# EAGLE board Mother-Child-merged (EAGLE 7.4.0), part 1 of 2
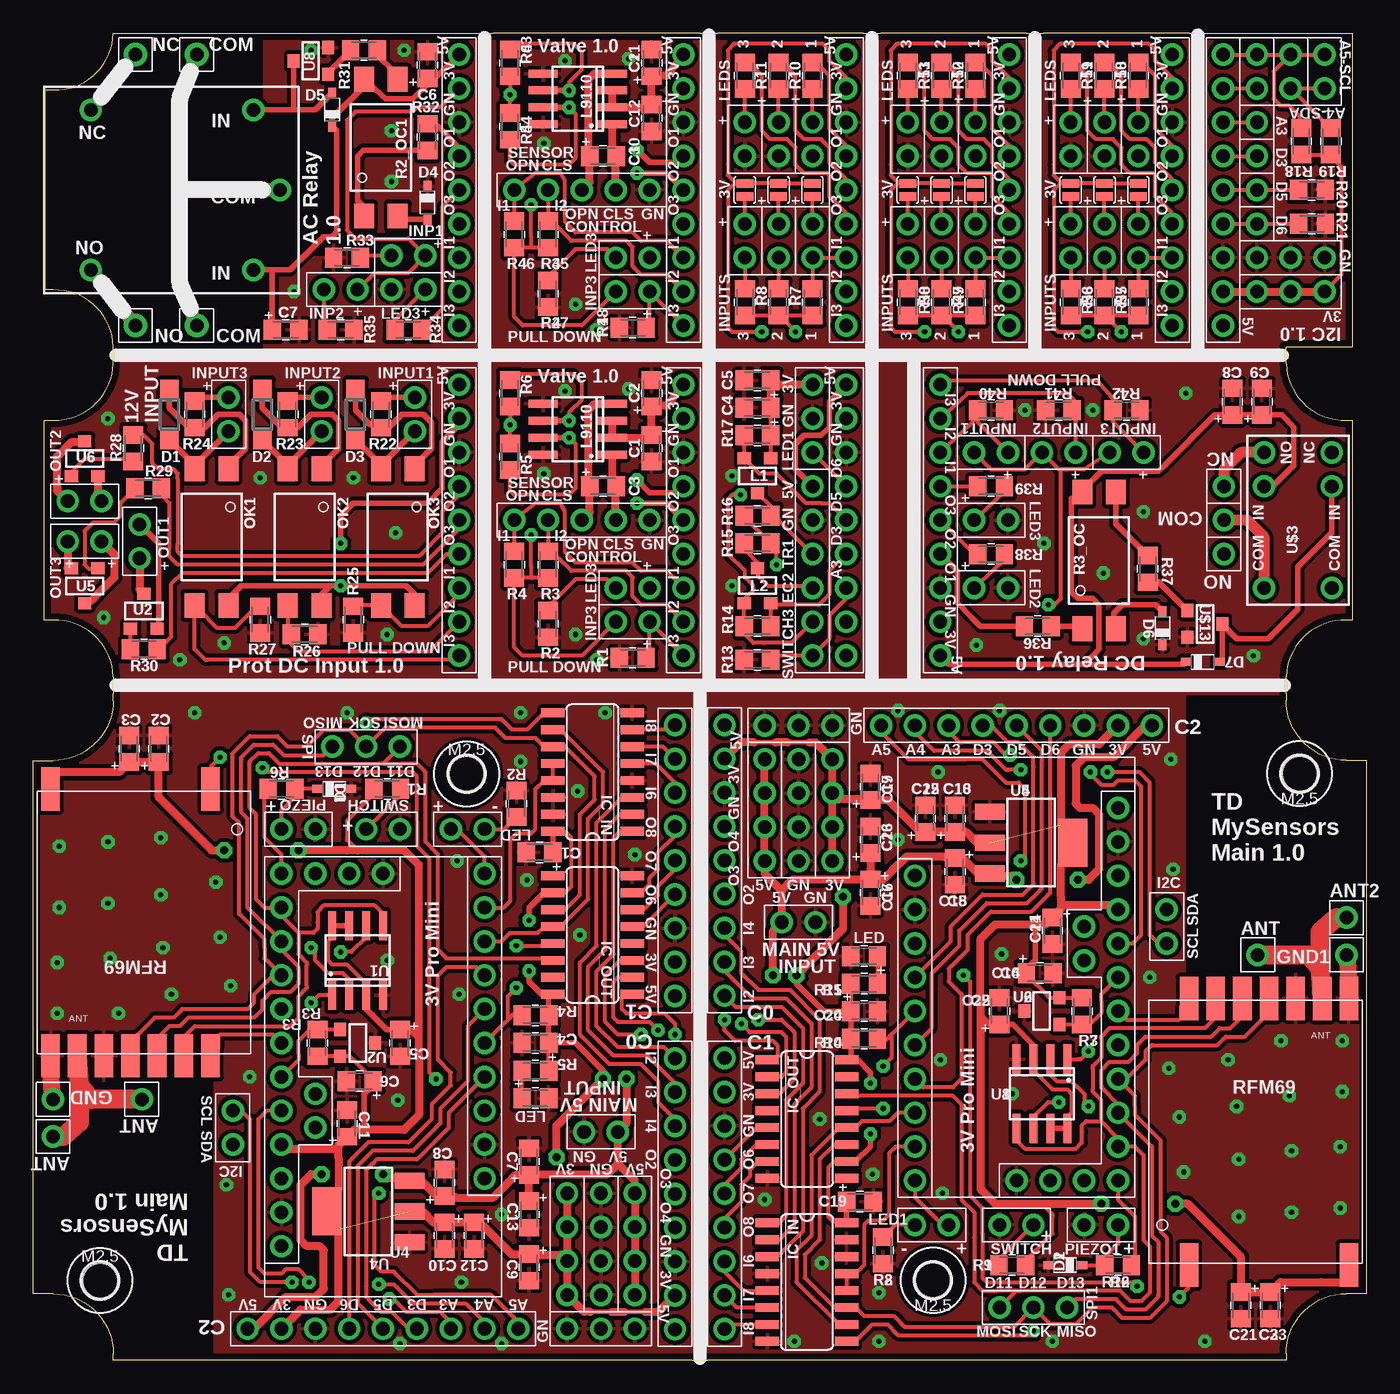
[diagram p0: board, top side]
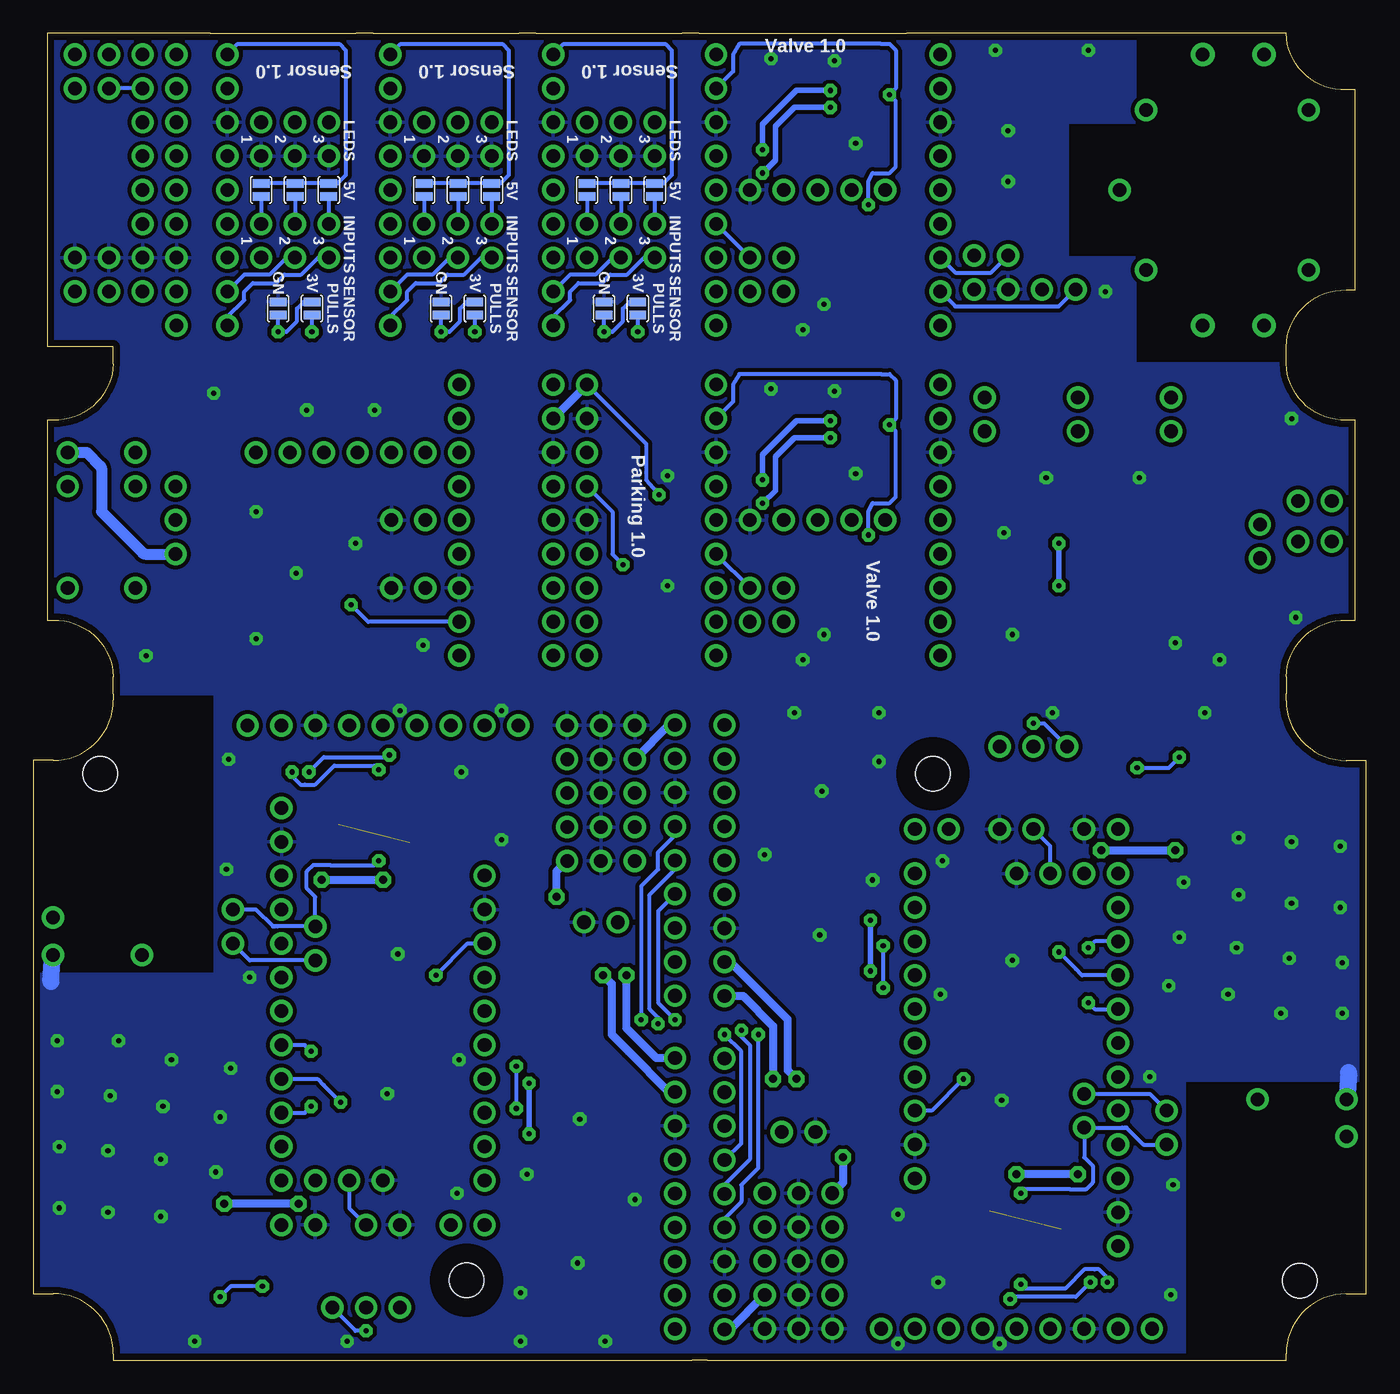
[diagram p1: board, bottom side, seen from below]

Size 100 x 99.53 mm. Coordinates in mm from the lower left corner, seen from the top.
Outline: 6,49.49 arc-90 1.5,44.99 0,44.99 0,4.99 1.5,4.99 arc-90 6,0.49 6,0 49.41,0 50.59,0 94,0 94,0.51 arc-90 98.5,5.01 100,5.01 100,45.01 98.5,45.01 arc-90 94,49.51 94,50 94,51.27 arc-90 98.5,55.51 98.94,55.51 98.94,70.52 98.5,70.52 arc-90 94,74.77 94,76.03 98.94,76.03 98.94,99.53 87.99,99.53 86.72,99.53 75.76,99.53 74.49,99.53 63.54,99.53 62.27,99.53 51.32,99.53 51.16,99.53 50.05,99.53 34.49,99.53 33.22,99.53 6,99.53 arc-90 1.5,95.29 0.83,95.29 0.83,80.28 1.5,80.28 arc-90 6,76.03 6,74.77 arc-90 1.5,70.52 0.83,70.52 0.83,55.52 1.5,55.52 arc-90 6,51.27 6,50 6,49.49
Copper layers (1*2*15*16): Top 0.035mm / dielectric 0.2mm / layer 2 0.035mm / dielectric 1.2mm / layer 15 0.035mm / dielectric 0.2mm / Bottom 0.035mm
Design rules "Elecrow_PCB_eagle_rule": minimum track width 6mil, minimum drill 12mil, track to track 6mil, track to pad 8mil, pad to pad 12mil, via to via 6mil, smd to smd 0mil, copper to edge 20mil, drill to drill 10mil, minimum pad ring 6mil, minimum via ring 6mil, stop-mask expansion 0mil, vias tented up to drill 100mil, thermal gap 10mil
tKeepout: area 16.1,85.2 to 21.2,90.3

## Footprints (pad centres in the part's own frame; a part is rotated, then mirrored left to right if it is on the bottom)
DUPONT_1 = drill 1.016 pad 1.676: 1 0,0
CAP_0805 = smd 1.3 x 1.5: 1 -1,0; 2 1,0
SOD323 = smd 0.8 x 0.6: A 1.25,0; C -1.25,0
SOD123 = smd 1.4 x 1.4: A 1.9,0; C -1.9,0
HOLE_M2.5PAN_TIGHT = hole 2.6: 0,0
DUPONT_2 = drill 1.016 pad 1.676: 1 -1.27,0; 2 1.27,0
SO16 = smd 0.66 x 1.75: 1 -4.445,-2.973; 2 -3.175,-2.973; 3 -1.905,-2.973; 4 -0.635,-2.973; 5 0.635,-2.973; 6 1.905,-2.973; 7 3.175,-2.973; 8 4.445,-2.973; 9 4.445,2.973; 10 3.175,2.973; 11 1.905,2.973; 12 0.635,2.973; 13 -0.635,2.973; 14 -1.905,2.973; 15 -3.175,2.973; 16 -4.445,2.973
DUPONT_4 = drill 1.016 pad 1.676: 1 -3.81,0; 2 -1.27,0; 3 1.27,0; 4 3.81,0
DUPONT_3 = drill 1.016 pad 1.676: 1 -2.54,0; 2 0,0; 3 2.54,0
SOT23-3 = smd 1 x 0.9: 1 -1,-1.3; 2 1,-1.3; 3 0,1.3
SO-08 = smd 0.6 x 2.2: 1 -1.905,-2.6; 2 -0.635,-2.6; 3 0.635,-2.6; 4 1.905,-2.6; 5 1.905,2.6; 6 0.635,2.6; 7 -0.635,2.6; 8 -1.905,2.6
LED_0805 = smd 1.3 x 1.5: 1 -1,0; 2 1,0
SO-4_PC817 = smd 1.85 x 1.5: 1 -5.125,1.27; 2 -5.125,-1.27; 3 5.125,-1.27; 4 5.125,1.27
R_0805 = smd 1.3 x 1.5: 1 -1,0; 2 1,0
RELAY_SRD-SL-C = drill 1.016 pad 1.676: 1 -6.15,6; 2 -6.15,-6; 3 -8.15,0; 4 6.05,6; 5 6.05,-6
PAD-JUMPER-2-NO_YES_SILK = smd 0.635 x 1.27: 1 -0.501,0; 2 0.501,0
PRO_MINI_CLONE = drill 1.016 pad 1.676: P$1 0,22.86; P$2 0,20.32; P$3 0,17.78; P$4 0,15.24; P$5 0,12.7; P$6 0,10.16; P$7 0,7.62; P$8 0,5.08; P$9 0,2.54; P$10 0,0; P$11 15.24,0; P$12 15.24,2.54; P$13 15.24,5.08; P$14 15.24,7.62; P$15 15.24,10.16; P$16 15.24,12.7; P$17 15.24,15.24; P$18 15.24,17.78; P$19 15.24,20.32; P$20 15.24,22.86; P$21 15.24,25.4; P$22 15.24,27.94; P$23 12.7,16.51; P$24 12.7,19.05; P$25 12.7,0; P$26 10.16,0; P$27 7.62,0
SOT223 = smd 1.219 x 2.235: 1 -2.311,-3.099; 2 0,-3.099; 3 2.311,-3.099 | smd 3.6 x 2.2: 4 0,3.099
DUPONT_MALE90_9 = drill 1.016 pad 1.676: 1 -10.16,0; 2 -7.62,0; 3 -5.08,0; 4 -2.54,0; 5 0,0; 6 2.54,0; 7 5.08,0; 8 7.62,0; 9 10.16,0
RFM69W_MS = smd 3.25 x 1.4: 2 -10,5; 8 -10,-7; 9 10,-7; 10 10,-5; 11 10,-3; 12 10,-1; 13 10,1; 14 10,3; 15 10,5
DUPONT_9 = drill 1.016 pad 1.676: 1 -10.16,0; 2 -7.62,0; 3 -5.08,0; 4 -2.54,0; 5 0,0; 6 2.54,0; 7 5.08,0; 8 7.62,0; 9 10.16,0
DUPONT_1_LRG = drill 1.016 pad 1.778: 1 0,0
DUPONT_FEM90_9 = drill 1.016 pad 1.676: 1 -10.16,0; 2 -7.62,0; 3 -5.08,0; 4 -2.54,0; 5 0,0; 6 2.54,0; 7 5.08,0; 8 7.62,0; 9 10.16,0
RELAY-G5V = drill 1.016 pad 1.676: 1 5.08,2.54; 2 2.54,2.54; 5 -5.08,2.54; 6 -5.08,-2.54; 9 2.54,-2.54; 10 5.08,-2.54
DUPONT_5 = drill 1.016 pad 1.676: 1 -5.08,0; 2 -2.54,0; 3 0,0; 4 2.54,0; 5 5.08,0

## Placement (x,y rotation side)
ANT  [DUPONT_1]  1.47,16.79 180 top
ANT1  [DUPONT_1]  8.14,19.58 180 top
ANT2  [DUPONT_1]  98.53,33.21 0 top
ANT3  [DUPONT_1]  91.86,30.42 0 top
C1  0.1uF  [CAP_0805]  37.98,38.09 180 top
C2  10uF  [CAP_0805]  9.41,45.87 90 top
C3  0.1uF  [CAP_0805]  7.19,45.87 90 top
C4  0.1uF  [CAP_0805]  37.67,23.81 180 top
C5  0.1uF  [CAP_0805]  27.51,23.81 270 top
C6  0.1uF  [CAP_0805]  24.49,20.95 180 top
C7  10uF  [CAP_0805]  37.19,14.92 90 top
C8  0.1uF  [CAP_0805]  30.84,13.33 90 top
C9  10uF  [CAP_0805]  37.19,6.98 270 top
C10  0.1uF  [CAP_0805]  30.84,9.36 270 top
C11  10uF  [CAP_0805]  23.54,17.77 90 top
C12  10uF  [CAP_0805]  33.06,9.36 270 top
C13  10uF  [CAP_0805]  37.19,10.95 270 top
C14  0.1uF  [CAP_0805]  75.51,29.05 0 top
C15  0.1uF  [CAP_0805]  69.16,36.67 270 top
C16  10uF  [CAP_0805]  62.81,35.08 270 top
C17  10uF  [CAP_0805]  62.81,43.02 90 top
C18  0.1uF  [CAP_0805]  69.16,40.64 90 top
C19  0.1uF  [CAP_0805]  62.02,11.91 0 top
C20  0.1uF  [CAP_0805]  62.33,26.19 0 top
C21  10uF  [CAP_0805]  90.59,4.13 270 top
C22  0.1uF  [CAP_0805]  72.49,26.19 90 top
C23  0.1uF  [CAP_0805]  92.81,4.13 270 top
C24  10uF  [CAP_0805]  76.46,32.23 270 top
C25  10uF  [CAP_0805]  66.94,40.64 90 top
C26  10uF  [CAP_0805]  62.81,39.05 90 top
C27  10uF  [CAP_0805]  46.4,72.54 90 top
C31  0.1uF  [CAP_0805]  42.74,65.56 0 top
C41  10uF  [CAP_0805]  54.33,71.43 180 top
C51  0.1uF  [CAP_0805]  54.33,73.5 180 top
C61  10uF  [CAP_0805]  29.57,97.15 90 top
C71  0.1uF  [CAP_0805]  18.93,77.31 0 top
C81  10uF  [CAP_0805]  89.96,71.91 90 top
C91  0.1uF  [CAP_0805]  92.18,71.91 90 top
C101  0.1uF  [CAP_0805]  42.74,90.32 0 top
C110  0.1uF  [CAP_0805]  46.4,68.42 270 top
C111  10uF  [CAP_0805]  46.4,97.31 90 top
C121  0.1uF  [CAP_0805]  46.4,93.18 270 top
D1  [SOD323]  22.59,42.86 0 top
D2  [SOD323]  77.41,7.14 180 top
D3  1N4148  [SOD123]  24.17,70.95 270 top
D4  [SOD323]  29.57,86.83 270 top
D5  [SOD323]  22.42,93.81 90 top
D6  [SOD323]  84.72,54.92 90 top
D7  [SOD323]  87.74,52.38 0 top
D11  1N4148  [SOD123]  10.2,70.95 270 top
D21  1N4148  [SOD123]  17.18,70.95 270 top
GND  [DUPONT_1]  1.47,19.58 180 top
GND1  [DUPONT_1]  98.53,30.42 0 top
H1  HOLE_MOUNTING_M2.5_TIGHT  [HOLE_M2.5PAN_TIGHT]  32.5,43.99 180 top
H2  HOLE_MOUNTING_M2.5_TIGHT  [HOLE_M2.5PAN_TIGHT]  5,5.99 180 top
H3  HOLE_MOUNTING_M2.5_TIGHT  [HOLE_M2.5PAN_TIGHT]  95,44.01 0 top
H4  HOLE_MOUNTING_M2.5_TIGHT  [HOLE_M2.5PAN_TIGHT]  67.5,6.01 0 top
I2C  [DUPONT_2]  14.97,17.46 270 top
I2C1  [DUPONT_2]  85.03,32.54 90 top
IC_IN  [SO16]  41.95,44.13 90 top
IC_IN1  [SO16]  58.05,5.87 270 top
IC_OUT  [SO16]  41.95,31.9 90 top
IC_OUT1  [SO16]  58.05,18.1 270 top
J3V1  [DUPONT_4]  40.05,8.72 90 top
J3V2  [DUPONT_4]  59.95,41.27 270 top
J5V  [DUPONT_4]  45.13,8.72 270 top
J5V1  [DUPONT_4]  54.87,41.27 90 top
JGN1  [DUPONT_4]  42.59,8.72 270 top
JGN2  [DUPONT_3]  42.59,2.38 180 top
JGN3  [DUPONT_3]  57.41,47.62 0 top
JGN4  [DUPONT_4]  57.41,41.27 90 top
JINP  [DUPONT_2]  42.59,17.14 180 top
JINP1  [DUPONT_2]  57.41,32.86 0 top
L1  [SOT23-3]  54.33,66.35 180 top
L2  [SOT23-3]  54.33,58.1 0 top
L3  L9110 Motor 1  [SO-08]  40.84,94.61 90 top
L9110  L9110 Motor 1  [SO-08]  40.84,69.84 90 top
LED  [DUPONT_2]  32.59,39.84 0 top
LED1  [DUPONT_2]  67.41,10.16 180 top
LED_SYS  [LED_0805]  37.67,19.68 0 top
LED_SYS1  [LED_0805]  62.33,30.32 180 top
OK1  [SO-4_PC817]  13.38,61.75 270 top
OK2  [SO-4_PC817]  20.36,61.75 270 top
OK3  [SO-4_PC817]  27.34,61.75 270 top
PIEZO  [DUPONT_2]  19.89,39.84 0 top
PIEZO1  [DUPONT_2]  80.11,10.16 180 top
PINP1  [DUPONT_2]  14.64,70.95 90 top
PINP2  [DUPONT_2]  21.63,70.95 90 top
PINP3  [DUPONT_2]  28.61,70.95 90 top
PRK_DIST  [DUPONT_4]  58.46,61.75 270 top
PRK_LED  [DUPONT_3]  58.46,70.64 270 top
PSWITCH  [DUPONT_2]  58.46,54.13 90 top
R1  10K  [R_0805]  26.55,42.86 0 top
R2  1K  [R_0805]  36.24,41.74 270 top
R2_LED  [DUPONT_2]  28.14,80.32 180 top
R2_OC1  [SO-4_PC817]  26.07,90.96 90 top
R2_RELAY  RELAY_SRD_SL_C  [RELAY_SRD-SL-C]  10.36,87.78 180 top
R2_SW  [DUPONT_2]  23.06,80.32 0 top
R2_SW1  [DUPONT_2]  28.14,82.86 0 top
R3  4.7K  [R_0805]  21.32,23.81 270 top
R3_LED  [DUPONT_2]  71.86,57.94 0 top
R3_LED1  [DUPONT_2]  71.86,63.02 0 top
R3_OC  [SO-4_PC817]  79.96,60 90 top
R4  10K  [R_0805]  37.67,25.87 180 top
R5  1K  [R_0805]  37.67,21.74 180 top
R6  220  [R_0805]  18.62,42.86 0 top
R7  4.7K  [R_0805]  78.68,26.19 90 top
R8  1K  [R_0805]  63.76,8.26 90 top
R9  10K  [R_0805]  73.44,7.14 180 top
R10  10K  [R_0805]  62.33,24.13 0 top
R11  1K  [R_0805]  62.33,28.26 0 top
R12  220  [R_0805]  81.38,7.14 180 top
R13  10K  [R_0805]  54.33,52.54 180 top
R14  10K  [R_0805]  54.33,55.08 180 top
R15  10K  [R_0805]  54.33,61.27 0 top
R16  10K  [R_0805]  54.33,63.34 180 top
R17  10K  [R_0805]  54.33,69.37 0 top
R18  4K7  [R_0805]  95.13,91.43 90 top
R19  4K7  [R_0805]  97.35,91.43 90 top
R20  10K  [R_0805]  95.92,87.78 0 top
R21  1K  [R_0805]  38.62,55.24 270 top
R22  4.7K  [R_0805]  26.07,70.95 90 top
R23  4.7K  [R_0805]  19.09,70.95 90 top
R24  4.7K  [R_0805]  12.11,70.95 90 top
R25  10K  [R_0805]  24.01,55.56 90 top
R26  10K  [R_0805]  20.36,54.45 180 top
R27  10K  [R_0805]  17.03,55.56 90 top
R28  1K  [R_0805]  7.5,68.42 270 top
R29  1K  [R_0805]  8.61,65.4 180 top
R30  1K  [R_0805]  8.29,53.33 180 top
R31  10K  [R_0805]  38.62,59.68 90 top
R32  1K  [R_0805]  29.57,91.75 90 top
R33  10K  [R_0805]  23.54,82.7 180 top
R34  1K  [R_0805]  28.14,77.31 0 top
R35  10K  [R_0805]  23.06,77.31 0 top
R36  1K  [R_0805]  75.35,55.08 180 top
R37  1K  [R_0805]  83.61,59.37 270 top
R38  1K  [R_0805]  71.86,60.48 180 top
R39  1K  [R_0805]  71.86,65.56 180 top
R40  10K  [R_0805]  71.86,71.27 0 top
R41  10K  [R_0805]  36.08,59.68 90 top
R42  10K  [R_0805]  82.02,71.27 0 top
R43  10K  [R_0805]  35.76,97.31 90 top
R44  10K  [R_0805]  35.76,92.55 270 top
R45  10K  [R_0805]  38.62,84.45 90 top
R46  10K  [R_0805]  36.08,84.45 90 top
R47  1K  [R_0805]  38.62,80 270 top
R48  10K  [R_0805]  44.97,77.46 180 top
R49  10K  [R_0805]  70.68,79.37 270 top
R50  10K  [R_0805]  68.14,79.37 270 top
R51  10K  [R_0805]  35.76,67.78 270 top
R52  1K  [R_0805]  70.68,96.36 270 top
R53  1K  [R_0805]  68.14,96.36 270 top
R54  1K  [R_0805]  65.6,96.36 270 top
R55  10K  [R_0805]  82.91,79.37 270 top
R56  10K  [R_0805]  80.37,79.37 270 top
R57  10K  [R_0805]  77.83,79.37 270 top
R58  1K  [R_0805]  82.91,96.36 270 top
R59  1K  [R_0805]  80.37,96.36 270 top
R60  1K  [R_0805]  77.83,96.36 270 top
R61  10K  [R_0805]  35.76,72.54 90 top
R71  10K  [R_0805]  58.46,79.37 270 top
R81  10K  [R_0805]  55.92,79.37 270 top
R91  10K  [R_0805]  53.38,79.37 270 top
R101  1K  [R_0805]  58.46,96.36 270 top
R110  10K  [R_0805]  44.97,52.7 180 top
R111  1K  [R_0805]  55.92,96.36 270 top
R121  1K  [R_0805]  53.38,96.36 270 top
R211  10K  [R_0805]  95.92,85.24 0 top
R311  1K  [R_0805]  24.8,98.26 180 top
R411  10K  [R_0805]  76.94,71.27 180 top
R511  10K  [R_0805]  65.6,79.37 270 top
RELAY4  [DUPONT_2]  7.98,61.43 90 top
RELAY5  [DUPONT_2]  3.85,61.43 180 top
RELAY6  [DUPONT_2]  3.85,64.45 0 top
RINP4  [DUPONT_2]  71.86,68.1 180 top
RINP5  [DUPONT_2]  76.94,68.1 180 top
RINP6  [DUPONT_2]  82.02,68.1 180 top
SENLED1  [DUPONT_2]  58.46,91.59 270 top
SENLED2  [DUPONT_2]  55.92,91.59 270 top
SENLED3  [DUPONT_2]  53.38,91.59 270 top
SENLED4  [DUPONT_2]  70.68,91.59 270 top
SENLED5  [DUPONT_2]  68.14,91.59 270 top
SENLED6  [DUPONT_2]  65.6,91.59 270 top
SENLED7  [DUPONT_2]  82.91,91.59 270 top
SENLED8  [DUPONT_2]  80.37,91.59 270 top
SENLED9  [DUPONT_2]  77.83,91.59 270 top
SENSOR1  [DUPONT_2]  58.46,83.97 90 top
SENSOR2  [DUPONT_2]  55.92,83.97 90 top
SENSOR3  [DUPONT_2]  53.38,83.97 90 top
SENSOR4  [DUPONT_2]  96.88,96.67 90 top
SENSOR5  [DUPONT_2]  44.97,55.4 180 top
SENSOR6  [DUPONT_2]  44.97,80.16 180 top
SENSOR7  [DUPONT_2]  91.8,96.67 90 top
SENSOR8  [DUPONT_2]  94.34,96.67 90 top
SENSOR9  [DUPONT_2]  70.68,83.97 90 top
SENSOR10  [DUPONT_2]  68.14,83.97 90 top
SENSOR11  [DUPONT_2]  65.6,83.97 90 top
SENSOR12  [DUPONT_2]  82.91,83.97 90 top
SENSOR13  [DUPONT_2]  80.37,83.97 90 top
SENSOR14  [DUPONT_2]  77.83,83.97 90 top
SJ1  [PAD-JUMPER-2-NO_YES_SILK]  58.46,87.78 90 top
SJ2  [PAD-JUMPER-2-NO_YES_SILK]  58.46,87.78 90 bottom
SJ3  [PAD-JUMPER-2-NO_YES_SILK]  55.92,87.78 90 top
SJ4  [PAD-JUMPER-2-NO_YES_SILK]  55.92,87.78 90 bottom
SJ5  [PAD-JUMPER-2-NO_YES_SILK]  53.38,87.78 90 top
SJ6  [PAD-JUMPER-2-NO_YES_SILK]  53.38,87.78 90 bottom
SJ7  [PAD-JUMPER-2-NO_YES_SILK]  54.65,78.89 270 bottom
SJ8  [PAD-JUMPER-2-NO_YES_SILK]  57.19,78.89 90 bottom
SJ9  [PAD-JUMPER-2-NO_YES_SILK]  70.68,87.78 90 top
SJ10  [PAD-JUMPER-2-NO_YES_SILK]  70.68,87.78 90 bottom
SJ11  [PAD-JUMPER-2-NO_YES_SILK]  68.14,87.78 90 top
SJ12  [PAD-JUMPER-2-NO_YES_SILK]  68.14,87.78 90 bottom
SJ13  [PAD-JUMPER-2-NO_YES_SILK]  65.6,87.78 90 top
SJ14  [PAD-JUMPER-2-NO_YES_SILK]  65.6,87.78 90 bottom
SJ15  [PAD-JUMPER-2-NO_YES_SILK]  66.87,78.89 270 bottom
SJ16  [PAD-JUMPER-2-NO_YES_SILK]  69.41,78.89 90 bottom
SJ17  [PAD-JUMPER-2-NO_YES_SILK]  82.91,87.78 90 top
SJ18  [PAD-JUMPER-2-NO_YES_SILK]  82.91,87.78 90 bottom
SJ19  [PAD-JUMPER-2-NO_YES_SILK]  80.37,87.78 90 top
SJ20  [PAD-JUMPER-2-NO_YES_SILK]  80.37,87.78 90 bottom
SJ21  [PAD-JUMPER-2-NO_YES_SILK]  77.83,87.78 90 top
SJ22  [PAD-JUMPER-2-NO_YES_SILK]  77.83,87.78 90 bottom
SJ23  [PAD-JUMPER-2-NO_YES_SILK]  79.1,78.89 270 bottom
SJ24  [PAD-JUMPER-2-NO_YES_SILK]  81.64,78.89 90 bottom
SPI  [DUPONT_3]  24.97,46.03 180 top
SPI1  [DUPONT_3]  75.03,3.97 0 top
SWITCH  [DUPONT_2]  26.24,39.84 0 top
SWITCH1  [DUPONT_2]  73.76,10.16 180 top
U1  [SO-08]  24.33,30 0 top
U2  [SOT23-3]  24.33,23.81 270 top
U3  [PRO_MINI_CLONE]  33.86,36.51 180 top
U4  AMS1117  [SOT223]  25.13,11.17 90 top
U5  AMS1117  [SOT223]  74.87,38.83 270 top
U6  [SOT23-3]  75.67,26.19 90 top
U7  [PRO_MINI_CLONE]  66.14,13.49 0 top
U8  [SO-08]  75.67,20 180 top
U21  [SOT23-3]  8.29,56.19 0 top
U51  [SOT23-3]  3.85,58.1 180 top
U61  [SOT23-3]  3.85,67.62 0 top
U$1  [DUPONT_MALE90_9]  48.15,37.49 90 top
U$2  RADIO_RFM69W_MS  [RFM69W_MS]  8.3,32.85 270 top
U$3  [DUPONT_MALE90_9]  48.15,12.49 90 top
U$4  [DUPONT_9]  26.24,2.38 0 top
U$5  RADIO_RFM69W_MS  [RFM69W_MS]  91.7,17.14 90 top
U$6  [DUPONT_MALE90_9]  51.85,12.51 270 top
U$7  [DUPONT_MALE90_9]  51.85,37.51 270 top
U$8  [DUPONT_9]  73.76,47.62 180 top
U$9  [DUPONT_1_LRG]  7.66,77.62 270 top
U$10  [DUPONT_1_LRG]  12.26,77.62 270 top
U$11  [DUPONT_FEM90_9]  31.95,63.02 90 top
U$12  [DUPONT_1_LRG]  12.26,97.94 270 top
U$13  [SOT23-3]  87.89,55.24 270 top
U$14  [DUPONT_FEM90_9]  68.05,63.02 270 top
U$15  [DUPONT_1]  89.32,60.48 90 top
U$16  [DUPONT_1]  89.32,63.02 90 top
U$17  [DUPONT_1]  89.32,65.56 90 top
U$18  [DUPONT_FEM90_9]  89.26,87.78 270 top
U$19  [DUPONT_1]  91.8,92.86 270 top
U$20  [DUPONT_1]  91.8,85.24 270 top
U$21  [DUPONT_FEM90_9]  48.78,63.02 90 top
U$22  [DUPONT_1]  91.8,90.32 270 top
U$23  [DUPONT_3]  94.34,82.7 0 top
U$24  [DUPONT_3]  94.34,80.16 0 top
U$25  [DUPONT_FEM90_9]  73.22,87.78 90 top
U$26  [DUPONT_FEM90_9]  85.45,87.78 90 top
U$31  RELAY_G5V1  [RELAY-G5V]  94.88,63.02 90 top
U$41  [DUPONT_9]  61,63.02 90 top
U$51  [DUPONT_FEM90_9]  48.78,87.78 90 top
U$61  [DUPONT_FEM90_9]  61,87.78 90 top
U$71  [DUPONT_FEM90_9]  31.95,87.78 90 top
U$81  [SOT23-3]  20.84,97.47 90 top
U$111  [DUPONT_1_LRG]  7.66,97.94 270 top
U$211  [DUPONT_1]  91.8,87.78 270 top
VALVE  [DUPONT_5]  41.16,63.02 180 top
VALVE1  [DUPONT_5]  41.16,87.78 180 top
VLV_LED  [DUPONT_2]  44.97,57.94 180 top
VLV_LED1  [DUPONT_2]  44.97,82.7 180 top

## Library data of the parts
ANT ANT1-ANT3 C1-C26 D1 D2 D4-D7 GND GND1 H1-H4 I2C I2C1 IC_IN IC_IN1 IC_OUT IC_OUT1 J3V1 J3V2 J5V J5V1 JGN1-JGN4 JINP JINP1 L1-L3 L9110 LED LED1 LED_SYS LED_SYS1 OK1-OK3 PIEZO PIEZO1 PINP1-PINP3 PRK_DIST PRK_LED PSWITCH R1 R2 R2_LED R2_OC1 R2_RELAY R2_SW R2_SW1 R3 R3_LED R3_LED1 R3_OC R4-R20 R22-R30 R32-R40 R42-R50 R52-R60 R91 R121 R511 RELAY4-RELAY6 RINP4-RINP6 SENLED1-SENLED9 SENSOR1-SENSOR14 SJ1-SJ24 SPI SPI1 SWITCH SWITCH1 U1-U8 U$1-U$26 U$41 U$51 U$61 U$71 U$81 U$111 U$211 VALVE VALVE1 VLV_LED VLV_LED1 = TD22057
C27 = TD22057; NAME1: C2
C31 = TD22057; NAME1: C3
C41 = TD22057; NAME1: C4
C51 = TD22057; NAME1: C5
C61 = TD22057; NAME1: C6
C71 = TD22057; NAME1: C7
C81 = TD22057; NAME1: C8
C91 = TD22057; NAME1: C9
C101 = TD22057; NAME1: C10
C110 = TD22057; NAME1: C1
C111 = TD22057; NAME1: C11
C121 = TD22057; NAME1: C12
D3 = diodes; MPN: 1N4148W; OC_FARNELL: 1651821; PACKAGE: SOD123; SUPPLIER: MULTICOMP
D11 = diodes; MPN: 1N4148W; NAME1: D1; OC_FARNELL: 1651821; PACKAGE: SOD123; SUPPLIER: MULTICOMP
D21 = diodes; MPN: 1N4148W; NAME1: D2; OC_FARNELL: 1651821; PACKAGE: SOD123; SUPPLIER: MULTICOMP
R21 = TD22057; NAME1: R2
R31 = TD22057; NAME1: R3
R41 = TD22057; NAME1: R4
R51 = TD22057; NAME1: R5
R61 = TD22057; NAME1: R6
R71 = TD22057; NAME1: R7
R81 = TD22057; NAME1: R8
R101 = TD22057; NAME1: R10
R110 = TD22057; NAME1: R1
R111 = TD22057; NAME1: R11
R211 = TD22057; NAME1: R21
R311 = TD22057; NAME1: R31
R411 = TD22057; NAME1: R41
U21 = TD22057; NAME1: U2
U51 = TD22057; NAME1: U5
U61 = TD22057; NAME1: U6
U$31 = TD22057; NAME1: U$3

## Nets
+3V1: C14.1 C17.1 C18.1 C19.1 C20.1 C21.1 C22.1 C23.1 C24.1 C25.1 IC_IN1.16 IC_OUT1.10 IC_OUT1.16 J3V2.1 J3V2.2 J3V2.3 J3V2.4 R7.2 R9.1 R10.1 R11.1 U5.2 U5.4 U6.2 U7.P$19 U8.3 U8.7 U8.8 U$5.8 U$6.2 U$7.2 U$8.2
+3V3: C1.1 C2.1 C3.1 C4.1 C5.1 C6.1 C9.1 C10.1 C11.1 C12.1 IC_IN.16 IC_OUT.10 IC_OUT.16 J3V1.1 J3V1.2 J3V1.3 J3V1.4 R1.1 R3.2 R4.1 R5.1 U1.3 U1.7 U1.8 U2.2 U3.P$19 U4.2 U4.4 U$1.2 U$2.8 U$3.2 U$4.2
+5V: C7.1 C8.1 C13.1 J5V.1 J5V.2 J5V.3 J5V.4 JINP.1 U4.3 U$1.1 U$3.1 U$4.1
+5V1: C15.1 C16.1 C26.1 J5V1.1 J5V1.2 J5V1.3 J5V1.4 JINP1.1 U5.3 U$6.1 U$7.1 U$8.1
ANALOG1: U7.P$18 U$8.7
ANALOG3: U3.P$18 U$4.7
CRYPT: R3.1 U2.1 U3.P$17
CRYPT1: R7.1 U6.1 U7.P$17
GND: C1.2 C2.2 C3.2 C4.2 C5.2 C6.2 C7.2 C8.2 C9.2 C10.2 C11.2 C12.2 C13.2 D1.A GND.1 IC_IN.4 IC_IN.8 IC_IN.14 IC_IN.15 IC_OUT.8 JGN1.1 JGN1.2 JGN1.3 JGN1.4 JGN2.1 JGN2.2 JGN2.3 JINP.2 LED_SYS.2 PIEZO.2 R2.1 SWITCH.2 U1.4 U2.3 U3.P$2 U3.P$21 U3.P$27 U4.1 U$1.3 U$2.9 U$2.11 U$3.3 U$4.3
GND1: C14.2 C15.2 C16.2 C17.2 C18.2 C19.2 C20.2 C21.2 C22.2 C23.2 C24.2 C25.2 C26.2 D2.A GND1.1 IC_IN1.4 IC_IN1.8 IC_IN1.14 IC_IN1.15 IC_OUT1.8 JGN3.1 JGN3.2 JGN3.3 JGN4.1 JGN4.2 JGN4.3 JGN4.4 JINP1.2 LED_SYS1.2 PIEZO1.2 R8.1 SWITCH1.2 U5.1 U6.3 U7.P$2 U7.P$21 U7.P$27 U8.4 U$5.9 U$5.11 U$6.3 U$7.3 U$8.3
I2C_+3V3: R18.1 R19.1 U$18.8 U$24.1 U$24.2 U$24.3
I2C_A3: U$18.3 U$19.1
I2C_D3: U$18.4 U$22.1
I2C_D5: R20.1 U$18.5 U$211.1
I2C_D6: R211.1 U$18.6 U$20.1
I2C_GND: R20.2 R211.2 U$18.7 U$23.1 U$23.2 U$23.3
I2C_SCL: R18.2 SENSOR4.2 SENSOR7.2 SENSOR8.2 U$18.1
I2C_SDA: R19.2 SENSOR4.1 SENSOR7.1 SENSOR8.1 U$18.2
INP1: IC_IN1.5 U$6.7
INP2: IC_IN.1 U$3.9
INP3: IC_IN.2 U$3.8
INP4: IC_IN.3 U$3.7
INP5: IC_IN1.7 U$6.9
INP6: IC_IN.5 U$1.7
INP7: IC_IN.6 U$1.8
INP8: IC_IN.7 U$1.9
INP9: IC_IN1.3 U$7.7
INP10: IC_IN1.1 U$7.9
INP11: IC_IN1.6 U$6.8
INP12: IC_IN1.2 U$7.8
IRQ: U3.P$4 U$4.6
IRQ1: U7.P$4 U$8.6
LED: LED.1 U3.P$10
LED1: LED1.1 U7.P$10
MEMORY_CS: U1.1 U3.P$15
MEMORY_CS1: U7.P$15 U8.1
MISO: IC_IN.9 SPI.3 U1.2 U3.P$13 U$2.13
MISO1: IC_IN1.9 SPI1.3 U7.P$13 U8.2 U$5.13
MOSI: IC_OUT.14 SPI.1 U1.5 U3.P$12 U$2.14
MOSI1: IC_OUT1.14 SPI1.1 U7.P$12 U8.5 U$5.14
N$1: LED.2 R2.2
N$2: LED_SYS.1 R5.2
N$3: D1.C PIEZO.1 R6.2
N$4: ANT2.1 ANT3.1 U$5.10
N$5: LED1.2 R8.2
N$6: LED_SYS1.1 R11.2
N$7: D2.C PIEZO1.1 R12.2
N$8: PINP1.2 R24.2
N$9: D21.C OK2.1 R23.1
N$10: D21.A OK2.2 PINP2.1
N$11: ANT1.1 ANT.1 U$2.10
N$12: C101.1 L3.4 VALVE1.3
N$13: D3.C OK3.1 R22.1
N$14: D3.A OK3.2 PINP3.1
N$15: PINP3.2 R22.2
N$16: R101.2 SENLED1.1
N$17: R111.2 SENLED2.1
N$18: R121.2 SENLED3.1
N$19: R30.2 U21.1
N$20: R52.2 SENLED4.1
N$21: RELAY4.1 U21.3
N$22: RELAY4.2 U21.2
N$23: C101.2 L3.1 VALVE1.2
N$24: R54.2 SENLED6.1
N$25: SENSOR11.2 SJ13.1 SJ14.1
N$26: SENSOR3.2 SJ5.1 SJ6.1
N$27: SENSOR2.2 SJ3.1 SJ4.1
N$28: R29.2 U51.1
N$29: R28.2 U61.1
N$30: R3_LED1.1 R39.1
N$31: C31.1 L9110.4 VALVE.3
N$32: RELAY5.2 U51.2
N$33: RELAY6.1 U61.3
N$34: RELAY6.2 U61.2
N$35: R2_LED.1 R34.1
N$36: D5.A R2_RELAY.2 U$81.3
N$37: R311.2 U$81.1
N$38: R2_OC1.3 R311.1
N$39: D4.A R2_OC1.2
N$40: R2_OC1.1 R32.1
N$41: C31.2 L9110.1 VALVE.2
N$42: R37.2 U$13.1
N$43: R3_OC.3 R37.1
N$44: D6.A R3_OC.2
N$45: R3_OC.1 R36.1
N$46: R3_LED.1 R38.1
N$47: U$16.1 U$31.5
N$48: SENSOR1.2 SJ1.1 SJ2.1
N$49: SENSOR10.2 SJ11.1 SJ12.1
N$50: SENSOR9.2 SJ9.1 SJ10.1
N$51: R21.1 VLV_LED.2
N$52: R59.2 SENLED8.1
N$53: R60.2 SENLED9.1
N$54: SENSOR14.2 SJ21.1 SJ22.1
N$55: SENSOR13.2 SJ19.1 SJ20.1
N$56: SENSOR12.2 SJ17.1 SJ18.1
N$61: D11.C OK1.1 R24.1
N$71: D11.A OK1.2 PINP1.1
N$111: PINP2.2 R23.2
N$121: R47.1 VLV_LED1.2
N$231: R53.2 SENLED5.1
N$311: RELAY5.1 U51.3
N$411: D7.A U$13.3 U$31.9
N$511: R58.2 SENLED7.1
OUT1: IC_OUT1.1 U$7.6
OUT2: IC_OUT.1 U$3.6
OUT3: IC_OUT.2 U$3.5
OUT4: IC_OUT.3 U$3.4
OUT5: IC_OUT1.2 U$7.5
OUT6: IC_OUT.5 U$1.4
OUT7: IC_OUT.6 U$1.5
OUT8: IC_OUT.7 U$1.6
OUT9: IC_OUT1.3 U$7.4
OUT10: IC_OUT1.5 U$6.4
OUT11: IC_OUT1.7 U$6.6
OUT12: IC_OUT1.6 U$6.5
PARK_+3V3: C41.1 C51.1 L1.1 L2.1 PRK_LED.1 PSWITCH.2 R14.2 R17.2 U$41.8
PARK_+5V: PRK_DIST.1 R15.2 R16.2 U$41.9
PARK_ECHO: L2.2 R14.1 U$41.4
PARK_ECHO_5V: L2.3 PRK_DIST.4 R15.1
PARK_GND: C41.2 C51.2 PRK_DIST.2 PRK_LED.2 R13.2 U$41.7
PARK_RING: PRK_LED.3 U$41.6
PARK_SWITCH: PSWITCH.1 R13.1 U$41.3
PARK_TRIGGER: L1.2 R17.1 U$41.5
PARK_TRIGGER_5V: L1.3 PRK_DIST.3 R16.1
PIEZO: R6.1 U3.P$11
PIEZO1: R12.1 U7.P$11
PROT_+3V3: OK1.4 OK2.4 OK3.4 U$11.8
PROT_GND: R25.1 R26.1 R27.1 U$11.7
PROT_INPUT1: OK1.3 R27.2 U$11.1
PROT_INPUT2: OK2.3 R26.2 U$11.2
PROT_INPUT3: OK3.3 R25.2 U$11.3
PROT_RELAY1: R30.1 U$11.4
PROT_RELAY2: R29.1 U$11.5
PROT_RELAY3: R28.1 U$11.6
PWM1: U3.P$6 U$4.5
PWM2: U3.P$7 U$4.4
PWM3: U7.P$7 U$8.4
PWM4: U7.P$6 U$8.5
R2_COM: R2_RELAY.3 U$10.1 U$12.1
R2_NC: R2_RELAY.5 U$111.1
R2_NC1: U$17.1 U$31.1
R2_NO: R2_RELAY.4 U$9.1
R2_NO1: U$15.1 U$31.10
RADIO_CS: U3.P$16 U$2.15
RADIO_CS1: U7.P$16 U$5.15
RADIO_IRQ: U3.P$3 U$2.2
RADIO_IRQ1: U7.P$3 U$5.2
RAW: U3.P$22
RAW1: U7.P$22
REL_AC_+3V3: R2_SW1.2 R2_SW.2 U$71.8
REL_AC_+5V: C61.1 C71.1 D5.C R2_OC1.4 R2_RELAY.1 U$71.9
REL_AC_GND: C61.2 C71.2 D4.C R2_LED.2 R33.2 R35.2 U$71.7 U$81.2
REL_AC_INP1: R2_SW1.1 R33.1 U$71.3
REL_AC_INP2: R2_SW.1 R35.1 U$71.2
REL_AC_LED2: R34.2 U$71.5
REL_AC_RELAY: R32.2 U$71.6
REL_DC_+3V3: RINP4.2 RINP5.2 RINP6.2 U$14.8
REL_DC_+5V: C81.1 C91.1 D7.C R3_OC.4 U$14.9 U$31.2
REL_DC_CTRL1: R36.2 U$14.6
REL_DC_GND: C81.2 C91.2 D6.C R3_LED1.2 R3_LED.2 R40.2 R42.2 R411.2 U$13.2 U$14.7
REL_DC_INP1: R40.1 RINP4.1 U$14.3
REL_DC_INP2: R411.1 RINP5.1 U$14.2
REL_DC_INP3: R42.1 RINP6.1 U$14.1
REL_DC_LED2: R38.2 U$14.5
REL_DC_LED3: R39.2 U$14.4
SCK: IC_IN.11 IC_OUT.11 SPI.2 U1.6 U3.P$14 U$2.12
SCK1: IC_IN1.11 IC_OUT1.11 SPI1.2 U7.P$14 U8.6 U$5.12
SCL: I2C.2 U3.P$24 U$4.9
SCL1: I2C1.2 U7.P$24 U$8.9
SDA: I2C.1 U3.P$23 U$4.8
SDA1: I2C1.1 U7.P$23 U$8.8
SENSOR_1: R71.1 SENSOR1.1 U$61.3
SENSOR_2: R81.1 SENSOR2.1 U$61.2
SENSOR_3: R91.1 SENSOR3.1 U$61.1
SENSOR_4: R49.1 SENSOR9.1 U$25.3
SENSOR_5: R50.1 SENSOR10.1 U$25.2
SENSOR_6: R511.1 SENSOR11.1 U$25.1
SENSOR_7: R55.1 SENSOR12.1 U$26.3
SENSOR_8: R56.1 SENSOR13.1 U$26.2
SENSOR_9: R57.1 SENSOR14.1 U$26.1
SENSOR_+3V1: SJ9.2 SJ11.2 SJ13.2 SJ15.2 U$25.8
SENSOR_+3V2: SJ17.2 SJ19.2 SJ21.2 SJ23.2 U$26.8
SENSOR_+3V3: SJ1.2 SJ3.2 SJ5.2 SJ7.2 U$61.8
SENSOR_+5V: SJ2.2 SJ4.2 SJ6.2 U$61.9
SENSOR_+5V1: SJ10.2 SJ12.2 SJ14.2 U$25.9
SENSOR_+5V2: SJ18.2 SJ20.2 SJ22.2 U$26.9
SENSOR_GND: SENLED1.2 SENLED2.2 SENLED3.2 SJ8.2 U$61.7
SENSOR_GND1: SENLED4.2 SENLED5.2 SENLED6.2 SJ16.2 U$25.7
SENSOR_GND2: SENLED7.2 SENLED8.2 SENLED9.2 SJ24.2 U$26.7
SENSOR_LED1: R101.1 U$61.6
SENSOR_LED2: R111.1 U$61.5
SENSOR_LED3: R121.1 U$61.4
SENSOR_LED4: R53.1 U$25.5
SENSOR_LED5: R52.1 U$25.6
SENSOR_LED6: R54.1 U$25.4
SENSOR_LED7: R59.1 U$26.5
SENSOR_LED8: R58.1 U$26.6
SENSOR_LED9: R60.1 U$26.4
SENSOR_PULL: R71.2 R81.2 R91.2 SJ7.1 SJ8.1
SENSOR_PULL1: R49.2 R50.2 R511.2 SJ15.1 SJ16.1
SENSOR_PULL2: R55.2 R56.2 R57.2 SJ23.1 SJ24.1
SHIFT_CS: IC_IN.10 IC_OUT.12 U3.P$8
SHIFT_CS1: IC_IN1.10 IC_OUT1.12 U7.P$8
SHIFT_IN_LOAD: IC_IN.12 IC_IN.13 U3.P$9
SHIFT_IN_LOAD1: IC_IN1.12 IC_IN1.13 U7.P$9
SHIFT_OUT_ENABLE: IC_OUT.13 R4.2 U3.P$5
SHIFT_OUT_ENABLE1: IC_OUT1.13 R10.2 U7.P$5
SWITCH: R1.2 SWITCH.1 U3.P$26
SWITCH1: R9.2 SWITCH1.1 U7.P$26
VALVE_+3V1: R43.1 R44.1 R45.1 R46.1 SENSOR6.2 U$51.8
VALVE_+3V3: R31.1 R41.1 R51.1 R61.1 SENSOR5.2 U$21.8
VALVE_+5V: C27.1 C110.1 L9110.2 L9110.3 U$21.9
VALVE_+5V1: C111.1 C121.1 L3.2 L3.3 U$51.9
VALVE_CLOSED: R31.2 U$21.2 VALVE.4
VALVE_CLOSED1: R45.2 U$51.2 VALVE1.4
VALVE_CONTROL1: L9110.6 R61.2 U$21.6
VALVE_CONTROL2: L9110.7 R51.2 U$21.5
VALVE_CONTROL3: L3.6 R43.2 U$51.6
VALVE_CONTROL4: L3.7 R44.2 U$51.5
VALVE_GND: C27.2 C110.2 L9110.5 L9110.8 R21.2 R110.2 U$21.7 VALVE.1
VALVE_GND1: C111.2 C121.2 L3.5 L3.8 R47.2 R48.2 U$51.7 VALVE1.1
VALVE_LED: U$21.4 VLV_LED.1
VALVE_LED1: U$51.4 VLV_LED1.1
VALVE_OPENED: R41.2 U$21.3 VALVE.5
VALVE_OPENED1: R46.2 U$51.3 VALVE1.5
VALVE_SENSOR1: R48.1 SENSOR6.1 U$51.1
VALVE_SENSOR3: R110.1 SENSOR5.1 U$21.1